# EAGLE board goldpins_1x_90 (EAGLE 7.7.0)

Size 108 x 89 mm. Coordinates in mm from the lower left corner, seen from the top.
Outline: 0,0 108,0 108,89 0,89 0,0
Copper layers (1*16): Top 0.035mm / dielectric 1.5mm / Bottom 0.035mm
Design rules "default": minimum track width 10mil, minimum drill 24mil, track to track 8mil, track to pad 8mil, pad to pad 8mil, via to via 8mil, smd to smd 8mil, copper to edge 40mil, drill to drill 8mil, minimum pad ring 10mil, minimum via ring 8mil, stop-mask expansion 4mil, vias tented up to drill 0mil, thermal gap 10mil

## Footprints (pad centres in the part's own frame; a part is rotated, then mirrored left to right if it is on the bottom)
1X02/90 = drill 1.016 long: 1 -1.27,-3.81; 2 1.27,-3.81
1X03/90 = drill 1.016 long: 1 -2.54,-3.81; 2 0,-3.81; 3 2.54,-3.81
1X04/90 = drill 1.016 long: 1 -3.81,-3.81; 2 -1.27,-3.81; 3 1.27,-3.81; 4 3.81,-3.81
1X05/90 = drill 1.016 long: 1 -5.08,-3.81; 2 -2.54,-3.81; 3 0,-3.81; 4 2.54,-3.81; 5 5.08,-3.81
1X06/90 = drill 1.016 long: 1 -6.35,-3.81; 2 -3.81,-3.81; 3 -1.27,-3.81; 4 1.27,-3.81; 5 3.81,-3.81; 6 6.35,-3.81
1X07/90 = drill 1.016 long: 1 -7.62,-3.81; 2 -5.08,-3.81; 3 -2.54,-3.81; 4 0,-3.81; 5 2.54,-3.81; 6 5.08,-3.81; 7 7.62,-3.81
1X08/90 = drill 1.016 long: 1 -8.89,-3.81; 2 -6.35,-3.81; 3 -3.81,-3.81; 4 -1.27,-3.81; 5 1.27,-3.81; 6 3.81,-3.81; 7 6.35,-3.81; 8 8.89,-3.81
1X09/90 = drill 1.016 long: 1 -10.16,-3.81; 2 -7.62,-3.81; 3 -5.08,-3.81; 4 -2.54,-3.81; 5 0,-3.81; 6 2.54,-3.81; 7 5.08,-3.81; 8 7.62,-3.81; 9 10.16,-3.81
1X10/90 = drill 1.016 long: 1 -11.43,-3.81; 2 -8.89,-3.81; 3 -6.35,-3.81; 4 -3.81,-3.81; 5 -1.27,-3.81; 6 1.27,-3.81; 7 3.81,-3.81; 8 6.35,-3.81; 9 8.89,-3.81; 10 11.43,-3.81
1X11/90 = drill 1.016 long: 1 -12.7,-3.81; 2 -10.16,-3.81; 3 -7.62,-3.81; 4 -5.08,-3.81; 5 -2.54,-3.81; 6 0,-3.81; 7 2.54,-3.81; 8 5.08,-3.81; 9 7.62,-3.81; 10 10.16,-3.81; 11 12.7,-3.81
1X12/90 = drill 1.016 long: 1 -13.97,-3.81; 2 -11.43,-3.81; 3 -8.89,-3.81; 4 -6.35,-3.81; 5 -3.81,-3.81; 6 -1.27,-3.81; 7 1.27,-3.81; 8 3.81,-3.81; 9 6.35,-3.81; 10 8.89,-3.81; 11 11.43,-3.81; 12 13.97,-3.81
1X13/90 = drill 1.016 long: 1 -15.24,-3.81; 2 -12.7,-3.81; 3 -10.16,-3.81; 4 -7.62,-3.81; 5 -5.08,-3.81; 6 -2.54,-3.81; 7 0,-3.81; 8 2.54,-3.81; 9 5.08,-3.81; 10 7.62,-3.81; 11 10.16,-3.81; 12 12.7,-3.81; 13 15.24,-3.81
1X14/90 = drill 1.016 long: 1 -16.51,-3.81; 2 -13.97,-3.81; 3 -11.43,-3.81; 4 -8.89,-3.81; 5 -6.35,-3.81; 6 -3.81,-3.81; 7 -1.27,-3.81; 8 1.27,-3.81; 9 3.81,-3.81; 10 6.35,-3.81; 11 8.89,-3.81; 12 11.43,-3.81; 13 13.97,-3.81; 14 16.51,-3.81
1X15/90 = drill 1.016 long: 1 -17.78,-3.81; 2 -15.24,-3.81; 3 -12.7,-3.81; 4 -10.16,-3.81; 5 -7.62,-3.81; 6 -5.08,-3.81; 7 -2.54,-3.81; 8 0,-3.81; 9 2.54,-3.81; 10 5.08,-3.81; 11 7.62,-3.81; 12 10.16,-3.81; 13 12.7,-3.81; 14 15.24,-3.81; 15 17.78,-3.81
1X16/90 = drill 1.016 long: 1 -19.05,-3.81; 2 -16.51,-3.81; 3 -13.97,-3.81; 4 -11.43,-3.81; 5 -8.89,-3.81; 6 -6.35,-3.81; 7 -3.81,-3.81; 8 -1.27,-3.81; 9 1.27,-3.81; 10 3.81,-3.81; 11 6.35,-3.81; 12 8.89,-3.81; 13 11.43,-3.81; 14 13.97,-3.81; 15 16.51,-3.81; 16 19.05,-3.81
1X17/90 = drill 1.016 long: 1 -20.32,-3.81; 2 -17.78,-3.81; 3 -15.24,-3.81; 4 -12.7,-3.81; 5 -10.16,-3.81; 6 -7.62,-3.81; 7 -5.08,-3.81; 8 -2.54,-3.81; 9 0,-3.81; 10 2.54,-3.81; 11 5.08,-3.81; 12 7.62,-3.81; 13 10.16,-3.81; 14 12.7,-3.81; 15 15.24,-3.81; 16 17.78,-3.81; 17 20.32,-3.81
1X18/90 = drill 1.016 long: 1 -21.59,-3.81; 2 -19.05,-3.81; 3 -16.51,-3.81; 4 -13.97,-3.81; 5 -11.43,-3.81; 6 -8.89,-3.81; 7 -6.35,-3.81; 8 -3.81,-3.81; 9 -1.27,-3.81; 10 1.27,-3.81; 11 3.81,-3.81; 12 6.35,-3.81; 13 8.89,-3.81; 14 11.43,-3.81; 15 13.97,-3.81; 16 16.51,-3.81; 17 19.05,-3.81; 18 21.59,-3.81
1X19/90 = drill 1.016 long: 1 -22.86,-3.81; 2 -20.32,-3.81; 3 -17.78,-3.81; 4 -15.24,-3.81; 5 -12.7,-3.81; 6 -10.16,-3.81; 7 -7.62,-3.81; 8 -5.08,-3.81; 9 -2.54,-3.81; 10 0,-3.81; 11 2.54,-3.81; 12 5.08,-3.81; 13 7.62,-3.81; 14 10.16,-3.81; 15 12.7,-3.81; 16 15.24,-3.81; 17 17.78,-3.81; 18 20.32,-3.81; 19 22.86,-3.81
1X20/90 = drill 1.016 long: 1 -24.13,-3.81; 2 -21.59,-3.81; 3 -19.05,-3.81; 4 -16.51,-3.81; 5 -13.97,-3.81; 6 -11.43,-3.81; 7 -8.89,-3.81; 8 -6.35,-3.81; 9 -3.81,-3.81; 10 -1.27,-3.81; 11 1.27,-3.81; 12 3.81,-3.81; 13 6.35,-3.81; 14 8.89,-3.81; 15 11.43,-3.81; 16 13.97,-3.81; 17 16.51,-3.81; 18 19.05,-3.81; 19 21.59,-3.81; 20 24.13,-3.81
1X22/90 = drill 1.016 long: 1 -26.67,-3.81; 2 -24.13,-3.81; 3 -21.59,-3.81; 4 -19.05,-3.81; 5 -16.51,-3.81; 6 -13.97,-3.81; 7 -11.43,-3.81; 8 -8.89,-3.81; 9 -6.35,-3.81; 10 -3.81,-3.81; 11 -1.27,-3.81; 12 1.27,-3.81; 13 3.81,-3.81; 14 6.35,-3.81; 15 8.89,-3.81; 16 11.43,-3.81; 17 13.97,-3.81; 18 16.51,-3.81; 19 19.05,-3.81; 20 21.59,-3.81; 21 24.13,-3.81; 22 26.67,-3.81
1X24/90 = drill 1.016 long: 1 -29.21,-3.81; 2 -26.67,-3.81; 3 -24.13,-3.81; 4 -21.59,-3.81; 5 -19.05,-3.81; 6 -16.51,-3.81; 7 -13.97,-3.81; 8 -11.43,-3.81; 9 -8.89,-3.81; 10 -6.35,-3.81; 11 -3.81,-3.81; 12 -1.27,-3.81; 13 1.27,-3.81; 14 3.81,-3.81; 15 6.35,-3.81; 16 8.89,-3.81; 17 11.43,-3.81; 18 13.97,-3.81; 19 16.51,-3.81; 20 19.05,-3.81; 21 21.59,-3.81; 22 24.13,-3.81; 23 26.67,-3.81; 24 29.21,-3.81

## Placement (x,y rotation side)
E$1  [1X02/90]  56,85 0 top
E$2  [1X03/90]  65,85 0 top
E$3  [1X04/90]  77,85 0 top
E$4  [1X05/90]  91,85 0 top
E$5  [1X06/90]  105,19 270 top
E$6  [1X07/90]  75,5 180 top
E$7  [1X08/90]  95,5 180 top
E$8  [1X09/90]  14,19 180 top
E$9  [1X10/90]  41,19 180 top
E$10  [1X11/90]  83,33 180 top
E$11  [1X12/90]  17,33 180 top
E$12  [1X13/90]  51,33 180 top
E$13  [1X14/90]  20,73 180 top
E$14  [1X15/90]  21,47 180 top
E$15  [1X16/90]  23,60 180 top
E$16  [1X17/90]  77,19 180 top
E$17  [1X18/90]  68,60 180 top
E$18  [1X19/90]  64,73 180 top
E$19  [1X20/90]  69,46 180 top
E$20  [1X22/90]  105,56 270 top
E$21  [1X24/90]  34,5 180 top

## Library data of the parts
E$1-E$21 = pinhead